# EAGLE board cortex-mpu - Copy (EAGLE 7.3.0)
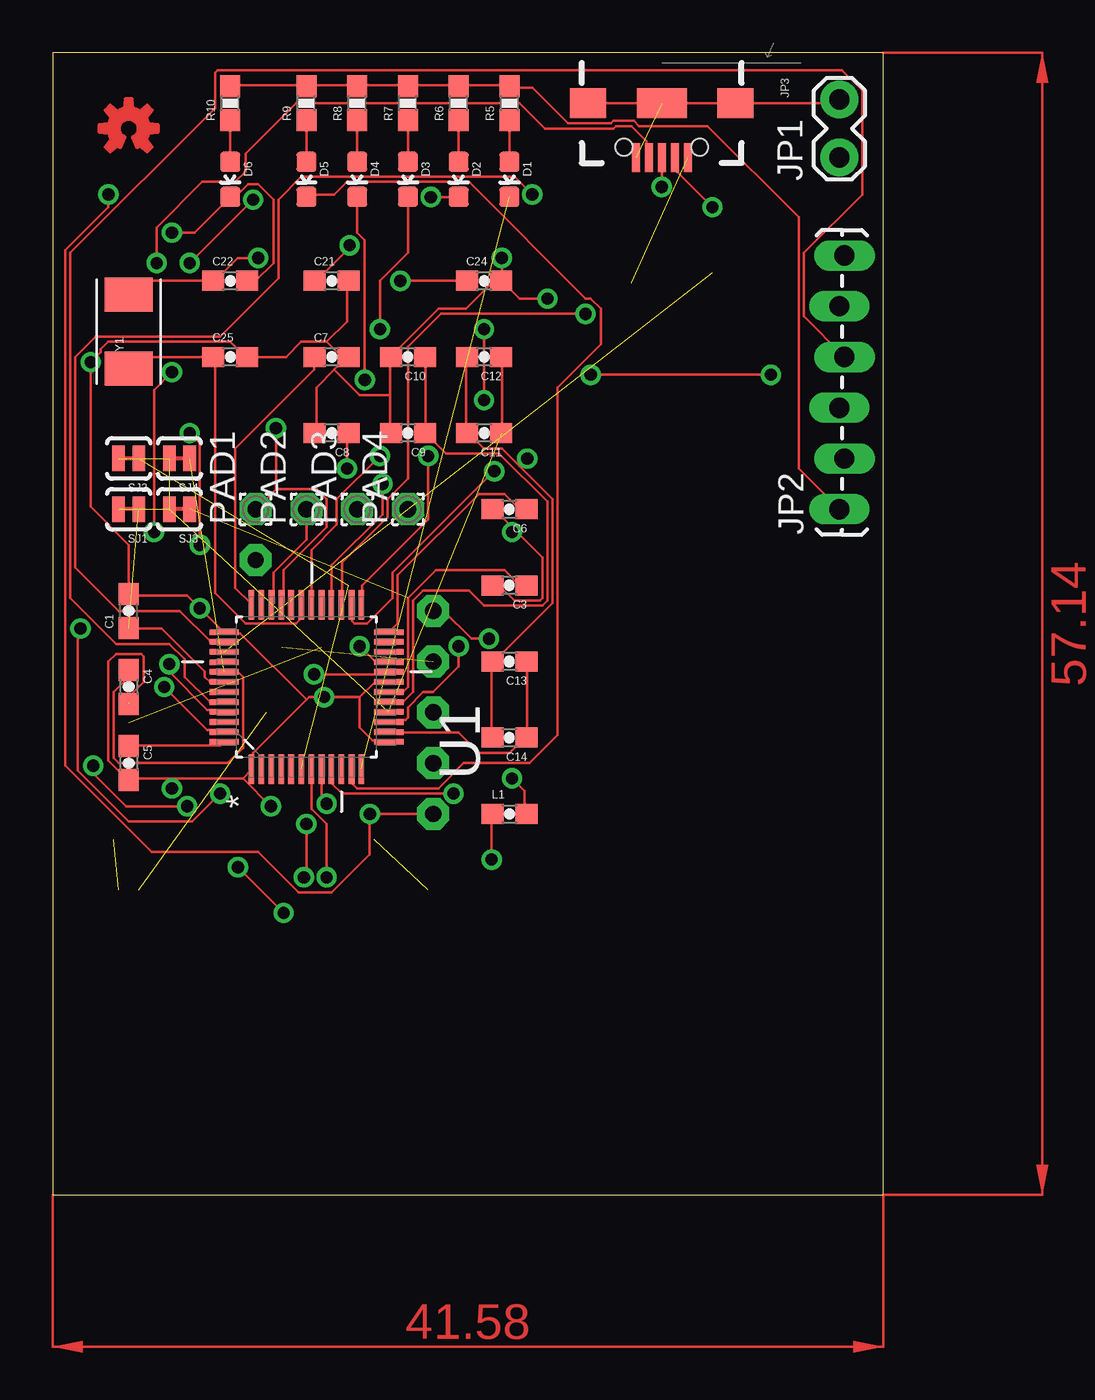
[diagram p0: board, top side]
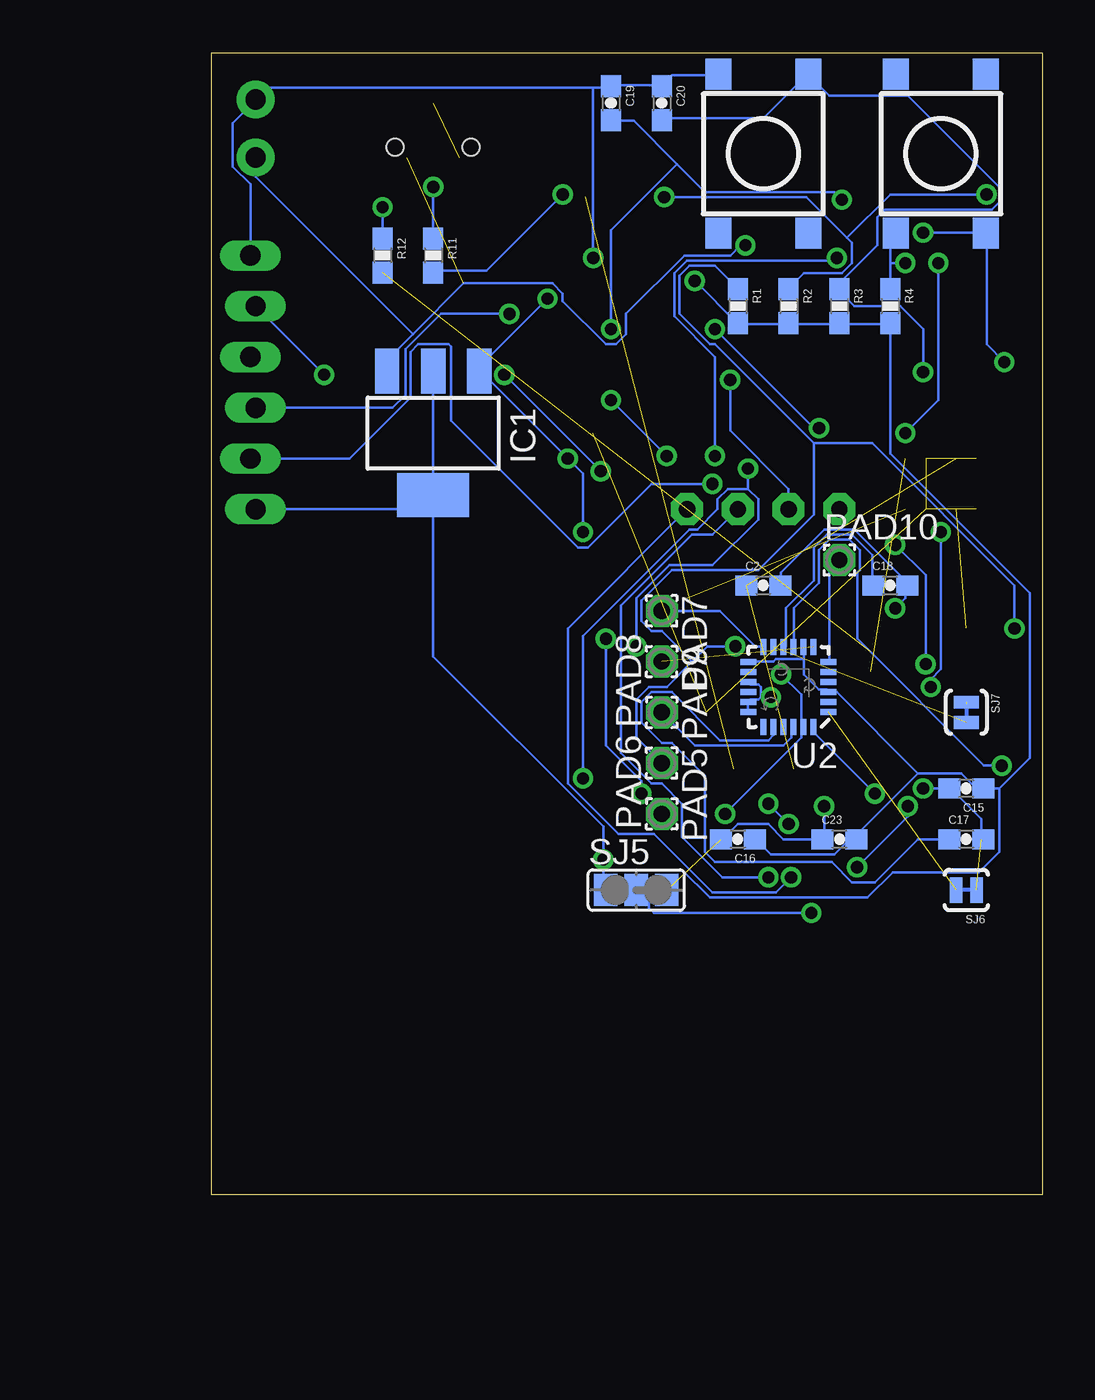
[diagram p1: board, bottom side, seen from below]

Size 41.58 x 57.14 mm. Coordinates in mm from the lower left corner, seen from the top.
Outline: 0,0 41.58,0 41.58,57.14 0,57.14 0,0
Copper layers (1*16): Top 0.035mm / dielectric 1.5mm / Bottom 0.035mm
Design rules "default *": minimum track width 5mil, minimum drill 24mil, track to track 5mil, track to pad 5mil, pad to pad 5mil, via to via 5mil, smd to smd 5mil, copper to edge 20mil, drill to drill 8mil, minimum pad ring 10mil, minimum via ring 8mil, stop-mask expansion 4mil, vias tented up to drill 0mil, thermal gap 10mil

## Footprints (pad centres in the part's own frame; a part is rotated, then mirrored left to right if it is on the bottom)
0603-CAP = smd 1.1 x 1: 1 -0.85,0; 2 0.85,0
LED-0603 = smd 1 x 1: A 0,-0.877; C 0,0.877
SOT223 = smd 1.219 x 2.235: 1 -2.311,-3.099; 2 0,-3.099; 3 2.311,-3.099 | smd 3.6 x 2.2: TAB 0,3.099
1X02_LOCK = drill 1.016 pad 1.88: 1 -0.178,0; 2 2.718,0
1X06_LOCK_LONGPADS = drill 1.016 long: 1 0,0; 2 2.54,-0.254; 3 5.08,0; 4 7.62,-0.254; 5 10.16,0; 6 12.7,-0.254
USB-B-MICRO-SMD_V03 = smd 1.45 x 0.4: D+1 2.725,0; D-1 2.725,0.65; GND1 2.725,-1.3; ID1 2.725,-0.65; VBUS1 2.725,1.3 | smd 1.5 x 1.8: SHIELD1 0,3.685; SHIELD2 0,-3.685 | smd 1.5 x 2.5: SHIELD3 0,0 | hole 0.85: 2.2,1.9; 2.2,-1.9
0603 = smd 1.1 x 1: 1 -0.85,0; 2 0.85,0
1,6/0,8 = drill 0.813 pad 1.6 octagon: 1 0,0
0603-RES = smd 1.1 x 1: 1 -0.85,0; 2 0.85,0
TACTILE_SWITCH_TALL = smd 1.55 x 1.3: A1 -3.975,-2.25; A2 3.975,-2.25; B1 -3.975,2.25; B2 3.975,2.25
PAD-JUMPER-2-NC_BY_TRACE_YES_SILK = smd 0.635 x 1.27: 1 -0.508,0; 2 0.508,0
PAD-JUMPER-3-2OF3_NC_BY_TRACE_YES_SILK_LARGE = smd 1.168 x 1.6: 1 -1.524,0; 2 0,0; 3 1.524,0
QFP50P900X900X120-48N = smd 1.473 x 0.279: 1 -4.115,2.743; 2 -4.115,2.261; 3 -4.115,1.753; 4 -4.115,1.245; 5 -4.115,0.762; 6 -4.115,0.254; 7 -4.115,-0.254; 8 -4.115,-0.762; 9 -4.115,-1.245; 10 -4.115,-1.753; 11 -4.115,-2.261; 12 -4.115,-2.743; 25 4.115,-2.743; 26 4.115,-2.261; 27 4.115,-1.753; 28 4.115,-1.245; 29 4.115,-0.762; 30 4.115,-0.254; 31 4.115,0.254; 32 4.115,0.762; 33 4.115,1.245; 34 4.115,1.753; 35 4.115,2.261; 36 4.115,2.743 | smd 0.279 x 1.473: 13 -2.743,-4.115; 14 -2.261,-4.115; 15 -1.753,-4.115; 16 -1.245,-4.115; 17 -0.762,-4.115; 18 -0.254,-4.115; 19 0.254,-4.115; 20 0.762,-4.115; 21 1.245,-4.115; 22 1.753,-4.115; 23 2.261,-4.115; 24 2.743,-4.115; 37 2.743,4.115; 38 2.261,4.115; 39 1.753,4.115; 40 1.245,4.115; 41 0.762,4.115; 42 0.254,4.115; 43 -0.254,4.115; 44 -0.762,4.115; 45 -1.245,4.115; 46 -1.753,4.115; 47 -2.261,4.115; 48 -2.743,4.115
QFN-24-NP = smd 0.8 x 0.3: 1 -2,1.25; 2 -2,0.75; 3 -2,0.25; 4 -2,-0.25; 5 -2,-0.75; 6 -2,-1.25; 13 2,-1.25; 14 2,-0.75; 15 2,-0.25; 16 2,0.25; 17 2,0.75; 18 2,1.25 | smd 0.3 x 0.8: 7 -1.25,-2; 8 -0.75,-2; 9 -0.25,-2; 10 0.25,-2; 11 0.75,-2; 12 1.25,-2; 19 1.25,2; 20 0.75,2; 21 0.25,2; 22 -0.25,2; 23 -0.75,2; 24 -1.25,2
CRYSTAL-TXC-7A = smd 1.7 x 2.4: P$1 1.85,0; P$2 -1.85,0

## Placement (x,y rotation side)
C1  100nF  [0603-CAP]  3.81,29.21 90 top
C2  100nF  [0603-CAP]  13.97,30.48 0 bottom
C3  100nF  [0603-CAP]  22.86,30.48 180 top
C4  100nF  [0603-CAP]  3.81,25.4 270 top
C5  100nF  [0603-CAP]  3.81,21.59 270 top
C6  100nF  [0603-CAP]  22.86,34.29 180 top
C7  100nF  [0603-CAP]  13.97,41.91 0 top
C8  100nF  [0603-CAP]  13.97,38.1 180 top
C9  1nF  [0603-CAP]  17.78,38.1 180 top
C10  4.7uF  [0603-CAP]  17.78,41.91 180 top
C11  470pF  [0603-CAP]  21.59,38.1 180 top
C12  2.2uF  [0603-CAP]  21.59,41.91 180 top
C13  1uF  [0603-CAP]  22.86,26.67 180 top
C14  10nF  [0603-CAP]  22.86,22.86 180 top
C15  10nF  [0603-CAP]  3.81,20.32 180 bottom
C16  0.1uF  [0603-CAP]  15.24,17.78 180 bottom
C17  2.2nF  [0603-CAP]  3.81,17.78 0 bottom
C18  0.1uF  [0603-CAP]  7.62,30.48 0 bottom
C19  100nF  [0603-CAP]  21.59,54.61 270 bottom
C20  100nF  [0603-CAP]  19.05,54.61 270 bottom
C21  10uF  [0603-CAP]  13.97,45.72 0 top
C22  22pF  [0603-CAP]  8.89,45.72 0 top
C23  100nF  [0603-CAP]  10.16,17.78 0 bottom
C24  10uF  [0603-CAP]  21.59,45.72 0 top
C25  22pF  [0603-CAP]  8.89,41.91 0 top
D1  GREEN  [LED-0603]  22.86,50.8 180 top
D2  GREEN  [LED-0603]  20.32,50.8 180 top
D3  GREEN  [LED-0603]  17.78,50.8 180 top
D4  GREEN  [LED-0603]  15.24,50.8 180 top
D5  GREEN  [LED-0603]  12.7,50.8 180 top
D6  BLUE  [LED-0603]  8.89,50.8 180 top
IC1  LM1117MPX-3.3  [SOT223]  30.48,38.1 180 bottom
JP1  [1X02_LOCK]  39.37,52.07 90 top
JP2  [1X06_LOCK_LONGPADS]  39.37,34.29 90 top
JP3  [USB-B-MICRO-SMD_V03]  30.48,54.61 270 top
L1  3.3uH  [0603]  22.86,19.05 0 top
LOGO1  OSHW-LOGOS-COPPER  [OSHW-LOGO-S_COPPER]  3.81,53.34 0 top
PAD1  [1,6/0,8]  10.16,34.29 90 top
PAD2  [1,6/0,8]  12.7,34.29 90 top
PAD3  [1,6/0,8]  15.24,34.29 90 top
PAD4  [1,6/0,8]  17.78,34.29 90 top
PAD5  [1,6/0,8]  19.05,21.59 270 bottom
PAD6  [1,6/0,8]  19.05,19.05 90 bottom
PAD7  [1,6/0,8]  19.05,29.21 270 bottom
PAD8  [1,6/0,8]  19.05,24.13 90 bottom
PAD9  [1,6/0,8]  19.05,26.67 270 bottom
PAD10  [1,6/0,8]  10.16,31.75 0 bottom
R1  10kR  [0603-RES]  15.24,44.45 270 bottom
R2  10kR  [0603-RES]  12.7,44.45 270 bottom
R3  10k  [0603-RES]  10.16,44.45 270 bottom
R4  10k  [0603-RES]  7.62,44.45 270 bottom
R5  150R  [0603-RES]  22.86,54.61 90 top
R6  150R  [0603-RES]  20.32,54.61 90 top
R7  150R  [0603-RES]  17.78,54.61 90 top
R8  150R  [0603-RES]  15.24,54.61 90 top
R9  150R  [0603-RES]  12.7,54.61 90 top
R10  1kR  [0603-RES]  8.89,54.61 90 top
R11  39R  [0603-RES]  30.48,46.99 270 bottom
R12  39R  [0603-RES]  33.02,46.99 270 bottom
S1  2SMD4  [TACTILE_SWITCH_TALL]  5.08,52.07 270 bottom
S2  2SMD-4  [TACTILE_SWITCH_TALL]  13.97,52.07 90 bottom
SJ1  [PAD-JUMPER-2-NC_BY_TRACE_YES_SILK]  3.81,34.29 180 top
SJ2  [PAD-JUMPER-2-NC_BY_TRACE_YES_SILK]  3.81,36.83 180 top
SJ3  [PAD-JUMPER-2-NC_BY_TRACE_YES_SILK]  6.35,34.29 180 top
SJ4  [PAD-JUMPER-2-NC_BY_TRACE_YES_SILK]  6.35,36.83 180 top
SJ5  SPK  [PAD-JUMPER-3-2OF3_NC_BY_TRACE_YES_SILK_LARGE]  20.32,15.24 0 bottom
SJ6  SPK  [PAD-JUMPER-2-NC_BY_TRACE_YES_SILK]  3.81,15.24 180 bottom
SJ7  SPK  [PAD-JUMPER-2-NC_BY_TRACE_YES_SILK]  3.81,24.13 270 bottom
U1  AT32UC3B164-AUT  [QFP50P900X900X120-48N]  12.7,25.4 90 top
U2  [QFN-24-NP]  12.7,25.4 180 bottom
Y1  7A-16  [CRYSTAL-TXC-7A]  3.81,43.18 90 top

## Library data of the parts
C1-C25 L1 R1-R12 SJ1-SJ7 = SparkFun-Passives
D1-D5 = SparkFun-LED; PROD_ID: DIO-00821
D6 = SparkFun-LED; PROD_ID: DIO-08575
IC1 = lm1117
JP1 JP2 = SparkFun-Connectors
JP3 = SparkFun-Connectors; PROD_ID: CONN-11752
LOGO1 = SparkFun-Aesthetics
PAD1-PAD10 = wirepad
S1 S2 = SparkFun-Electromechanical; PROD_ID: SWCH-11966
U1 = Atmel_By_element14_Batch_1-00; DESCRIPTION: MCU; MPN: AT32UC3B164-AUT; OC_FARNELL: 1841642; OC_NEWARK: 12T1375; PACKAGE: QFP-48; SUPPLIER: Atmel
U2 = SparkFun-Sensors
Y1 = SparkFun-FreqCtrl

## Nets
ADVREF: C13.1 C14.1 U1.14
DM: R12.2 U1.39
DP: R11.2 U1.38
E_SDA: PAD10.1 U2.6
GND: C1.2 C2.2 C3.2 C4.2 C5.2 C6.2 C7.2 C8.2 C9.2 C10.2 C11.2 C12.2 C13.2 C14.2 C15.2 C16.2 C17.2 C18.2 C19.1 C20.1 C21.2 C22.2 C23.1 C24.2 C25.2 D6.C IC1.1 JP1.2 JP2.6 JP3.GND1 JP3.SHIELD1 JP3.SHIELD2 JP3.SHIELD3 S1.B2 S2.B2 SJ5.3 SJ6.1 SJ7.1 U1.1 U1.13 U1.19 U1.37 U2.15 U2.17 U2.18
N$1: JP3.D-1 R12.1
N$2: JP3.D+1 R11.1
N$3: D1.A R5.1
N$4: D2.A R6.1
N$5: D6.A R10.1
N$6: D3.A R7.1
N$7: D4.A R8.1
N$8: D5.A R9.1
N$9: SJ6.2 U2.1
N$10: C18.1 U2.10
N$11: C17.1 U2.20
N$12: SJ5.2 U2.9
N$14: PAD9.1 U2.7
N$15: SJ7.2 U2.11
N$16: PAD8.1 U2.22
PA0: U1.3
PA1: U1.4
PA2: U1.5
PA3: PAD3.1 U1.7
PA4: PAD4.1 U1.8
PA5: PAD7.1 U1.9 U2.12
PA6: U1.10
PA7: D5.C U1.11
PA8: D1.C U1.12
PA9: D2.C PAD6.1 R2.1 U1.20 U2.23
PA10: PAD5.1 R1.1 U1.21 U2.24
PA11: U1.22
PA12: U1.23
PA13: C19.2 R4.1 S1.A2 U1.25
PA14: JP2.5 U1.26
PA15: JP2.3 U1.27
PA16: JP2.2 U1.28
PA17: U1.29
PA18: C22.1 U1.30 Y1.P$1
PA19: C25.1 U1.31 Y1.P$2
PA20: U1.32
PA21: D3.C PAD1.1 U1.33
PA22: D4.C PAD2.1 U1.34
PA23: U1.35
PA24: U1.43
PA25: JP2.4 U1.44
PA26: JP3.ID1 U1.45
PA27: U1.46
RESET_N: C20.2 R3.1 S2.A2 U1.47
VBUS: C21.1 IC1.3 JP1.1 JP3.VBUS1
VCC: C15.1 C16.1 C23.2 C24.1 IC1.2 IC1.TAB JP2.1 L1.1 R1.2 R2.2 R3.2 R4.2 R5.2 R6.2 R7.2 R8.2 R9.2 R10.2 SJ5.1 U2.3 U2.8 U2.13
VDDANA: C8.1 L1.2 U1.15
VDDCORE0: C1.1 SJ1.1 U1.42
VDDCORE1: C2.1 SJ2.1 U1.6
VDDCORE2: C3.1 SJ3.1 U1.18
VDDIN: C9.1 C10.1 U1.17
VDDIO0: C5.1 U1.48
VDDIO1: C6.1 U1.24
VDDIO2: C7.1 U1.36
VDDOUT: C11.1 C12.1 SJ1.2 SJ2.2 SJ3.2 SJ4.2 U1.16
VDDPLL: C4.1 SJ4.1 U1.41

## Tracks (layer width: path | path; a pad name or v marks a point on that pad's centre or on a via)
ADVREF
  Top 0.127: C13.1 23.75,26.67 23.75,22.86 C14.1 23.62,22.86 22.86,22.1 21.34,22.1 20.32,23.11 16.89,23.11 U1.14
DM  (1 unrouted)
DP  (via drill 0.61)
  Top 0.127: v24,50.04 23.11,50.93 12.45,50.93 11.3,49.78 11.3,45.85 8.38,42.93 2.16,42.93 1.14,41.91 1.14,31.37 3.3,29.21 6.35,29.21 7.87,27.69 8.51,27.69 U1.38
  Bottom 0.127: v24,50.04 27.81,46.23 30.48,46.23 R11.2
E_SDA
  Bottom 0.127: PAD10.1 10.67,31.24 10.67,26.67 U2.6
GND  (via drill 0.61)  (4 unrouted)
  Top 0.127: JP3.SHIELD2 JP3.SHIELD3 JP3.SHIELD1 39.24,54.61 39.37,54.74 JP1.2 | 15.37,24.89 v13.59,24.89 12.83,24.89 12.7,24.77 | 15.37,24.89 16.13,25.65 U1.19 | 15.37,24.89 15.37,23.37 16,22.73 16.76,22.73 U1.13 | 9.52,20.83 5.97,20.83 | 5.97,20.83 3.81,20.83 C5.2 3.81,20.7 2.79,21.72 2.79,26.67 3.17,27.05 4.45,27.05 4.57,26.92 4.57,25.65 3.81,24.89 C4.2 | 9.52,20.83 9.91,21.21 U1.1 10.03,21.34 10.03,22.1 12.7,24.77 | 5.97,20.83 v5.97,20.32 | 9.52,20.83 v10.92,19.43 | 12.7,24.77 9.4,28.07 8.64,28.07 U1.37 8.51,28.19 v7.37,29.34 6.73,29.97 3.81,29.97 C1.2 3.81,32.51 1.91,34.42 v1.91,41.66 2.41,42.16 2.41,42.29 2.79,42.67 8.89,42.67 9.65,41.91 C25.2 11.68,41.91 12.45,42.67 13.72,42.67 | C22.2 10.16,45.72 11.05,46.61 11.05,49.78 10.29,50.55 9.78,50.55 9.27,50.04 8.89,50.04 D6.C 7.11,48.13 v5.97,48.13 | 14.61,41.78 14.73,41.91 C7.2 14.61,41.78 | 14.61,41.78 14.1,41.28 | 14.1,41.28 13.21,40.39 13.21,38.1 C8.2 | 14.61,41.78 13.72,42.67 | 13.72,42.67 14.73,43.69 14.73,45.72 C21.2 | C14.2 21.97,22.86 21.97,26.67 C13.2 22.1,26.67 25.02,29.59 25.02,34.8 23.37,36.45 | C12.2 20.7,41.91 20.7,38.1 C11.2 20.83,38.1 21.59,37.34 22.48,37.34 23.37,36.45 | C3.2 22.35,30.48 23.11,29.72 24.38,29.72 24.51,29.84 24.51,31.88 23.11,33.27 | 23.11,33.27 22.1,34.29 C6.2 | 16.89,41.91 16.89,40.01 | 16.89,40.01 16.89,38.1 C9.2 | 16.89,41.91 19.3,44.32 20.7,44.32 22.1,45.72 C24.2 22.48,45.72 | 16.89,41.91 C10.2 | v24.77,44.83 23.37,44.83 22.48,45.72 | v22.99,33.15 23.11,33.27 | v23.75,36.83 23.37,36.45 | 14.1,41.28 15.37,40.01 16.89,40.01 | 22.48,45.72 v22.48,46.86
  Bottom 0.127: 19.05,55.5 21.59,55.5 C19.1 21.59,55.37 22.48,55.37 | 19.05,55.5 18.54,56.01 16.26,56.01 S2.B2 | 19.05,55.5 C20.1 | JP2.6 39.62,50.55 40.51,51.44 40.51,53.59 39.37,54.74 JP1.2 39.37,54.86 38.86,55.37 22.48,55.37 | 6.86,30.48 6.86,30.73 9.4,33.27 10.92,33.27 13.08,31.12 13.08,30.48 C2.2 | U2.18 14.73,24.26 14.73,24.64 U2.17 14.61,24.77 14.22,24.77 14.1,24.89 | 14.1,24.89 14.1,25.4 14.22,25.53 14.61,25.53 U2.15 | v13.59,24.89 14.1,24.89 | C16.2 16,17.78 15.24,18.54 13.72,18.54 12.95,17.78 C23.1 10.92,17.78 v10.92,19.43 | C17.2 3.05,17.78 3.05,18.8 4.57,20.32 C15.2 v5.97,20.32 | 6.86,30.48 6.86,29.84 v7.37,29.34 | 6.86,30.48 C18.2 | v5.97,48.13 2.92,48.13 S1.B2 2.79,48.01 2.79,42.55 v1.91,41.66 | v24.77,44.83 28.07,41.53 28.07,41.28 IC1.1 28.07,41.15 v23.75,36.83 22.99,36.07 v22.99,33.15 | v22.48,46.86 22.48,55.37
N$1  (via drill 0.61)
  Top 0.127: v33.02,49.4 31.24,51.18 31.24,51.82 JP3.D-1
  Bottom 0.127: v33.02,49.4 R12.1
N$2  (via drill 0.61)
  Top 0.127: JP3.D+1 v30.48,50.42
  Bottom 0.127: v30.48,50.42 R11.1
N$3
  Top 0.127: R5.1 D1.A
N$4
  Top 0.127: R6.1 D2.A
N$5
  Top 0.127: R10.1 D6.A
N$6
  Top 0.127: R7.1 D3.A
N$7
  Top 0.127: R8.1 D4.A
N$8
  Top 0.127: R9.1 D5.A
N$9  (1 unrouted)
N$10
  Bottom 0.127: U2.10 12.83,27.43 12.83,29.34 11.43,30.73 11.43,32.38 10.8,33.02 9.52,33.02 8.51,32 8.51,30.48 C18.1
N$11
  Bottom 0.127: C17.1 6.22,17.78 8.38,15.62 9.52,15.62 10.54,16.64 16.38,16.64 16.89,17.15 16.89,20.95 18.54,22.61 19.05,22.61 20.07,23.62 20.07,24.64 19.56,25.15 18.54,25.15 16.13,22.73 13.72,22.73 13.46,22.99 13.46,23.37 U2.20
N$12  (via drill 0.61)
  Top 0.127: v2.03,21.46 2.03,21.08 3.68,19.43 v6.73,19.43 | v11.56,14.1 v9.27,16.38
  Bottom 0.127: v2.03,21.46 2.92,21.46 9.27,27.81 9.27,31.12 9.14,31.24 9.14,32.26 9.65,32.77 10.67,32.77 11.18,32.26 11.18,30.61 12.45,29.34 12.45,27.43 U2.9 | v6.73,19.43 6.73,18.92 v9.27,16.38 | v11.56,14.1 19.43,14.1 19.69,14.35 19.69,15.11 19.05,15.24
N$14  (1 unrouted)
N$15  (1 unrouted)
N$16
  Bottom 0.127: PAD8.1 17.4,22.48 12.95,22.48 12.57,22.86 12.57,23.37 U2.22
PA3  (via drill 0.61)
  Top 0.127: U1.7 12.95,19.3 13.72,18.54 v13.72,15.88
  Bottom 0.127: v13.72,15.88 16,15.88 18.03,17.91 18.03,19.56 19.05,20.57 19.56,20.57 21.08,22.1 21.08,29.46 17.53,33.02 16.51,33.02 PAD3.1
PA4  (via drill 0.61)
  Top 0.127: U1.8 13.46,19.81 v13.72,19.56 | v12.7,18.54 12.7,16 v12.57,15.88
  Bottom 0.127: v12.7,18.54 v13.72,19.56 | v12.57,15.88 13.33,15.11 16.51,15.11 19.43,18.03 21.21,18.03 23.75,20.57 23.75,28.32 PAD4.1
PA5  (via drill 0.61)
  Top 0.127: v20.07,20.07 14.48,20.07 13.97,20.57 13.97,21.21 U1.9 | v21.84,27.81 20.95,27.81 19.56,29.21 PAD7.1
  Bottom 0.127: PAD7.1 16.13,29.21 14.35,27.43 13.97,27.43 U2.12 | v20.07,20.07 20.07,20.7 21.84,22.48 v21.84,27.81
PA7
  Top 0.127: D5.C 12.7,50.04 14.1,50.04 14.73,50.67 20.83,50.67 26.67,44.83 26.92,44.83 27.43,44.32 27.43,42.55 25.27,40.39 25.27,22.99 23.88,21.59 20.57,21.59 19.3,20.32 15.24,20.32 14.99,20.57 14.99,21.21 U1.11
PA8  (1 unrouted)
PA9  (via drill 0.61)
  Top 0.127: v18.92,49.91 D2.C | v13.08,26.04 16.64,26.04 16.76,26.16 U1.20 | PAD6.1 v15.88,19.05 15.88,17.02 13.97,15.11 12.32,15.11 10.29,17.15 4.95,17.15 0.63,21.46 0.63,47.24 2.79,49.4 v2.79,50.04
  Bottom 0.127: v18.92,49.91 11.81,49.91 9.78,47.88 | 9.78,47.88 9.52,47.62 9.52,46.61 10.03,46.1 11.94,46.1 12.7,45.34 R2.1 | v13.08,26.04 12.06,25.02 12.06,23.49 U2.23 12.06,23.37 12.06,22.86 v15.88,19.05 | 9.78,47.88 7.62,50.04 v2.79,50.04
PA10  (via drill 0.61)
  Top 0.127: v15.37,27.43 16.13,26.67 16.76,26.67 U1.21 | v8.38,20.07 6.98,18.67 3.81,18.67 1.27,21.21 1.27,28.19 v1.4,28.32
  Bottom 0.127: v15.37,27.43 16.76,27.43 17.53,26.67 | 17.53,26.67 18.8,25.4 19.69,25.4 20.32,24.77 20.32,22.86 PAD5.1 | v8.38,20.07 11.43,23.11 11.43,23.37 U2.24 | v1.4,28.32 1.4,30.48 8.51,37.59 11.43,37.59 | 11.43,37.59 16.38,42.55 16.64,42.55 18.16,44.07 18.16,45.97 17.65,46.48 16.38,46.48 15.24,45.34 R1.1 | 17.53,26.67 19.05,28.19 19.56,28.19 20.07,28.7 20.07,29.72 18.54,31.24 14.22,31.24 11.43,34.04 11.43,37.59
PA13  (via drill 0.61)
  Top 0.127: v6.86,46.61 v10.03,49.78 | v18.8,36.96 18.8,33.78 15.49,30.48 15.49,29.59 U1.25 | v21.59,43.31 v21.59,39.75
  Bottom 0.127: 7.62,46.61 7.62,47.75 7.37,48.01 S1.A2 | 7.62,46.61 R4.1 | 18.29,51.56 16.89,50.17 10.41,50.17 v10.03,49.78 | 18.29,51.56 20.45,53.72 21.59,53.72 C19.2 | 7.62,46.61 v6.86,46.61 | v21.59,39.75 v18.8,36.96 | v21.59,43.31 21.59,48.26 18.29,51.56
PA14  (via drill 0.61)
  Top 0.127: v22.1,36.2 17.02,31.12 17.02,29.84 15.75,28.58 15.11,28.58 14.99,28.7 14.99,29.46 U1.26 | v35.94,41.02 v26.92,41.02
  Bottom 0.127: v26.92,41.02 v22.1,36.2 | JP2.5 v35.94,41.02
PA15  (via drill 0.61)
  Top 0.127: v26.67,44.07 19.43,44.07 17.78,42.42 17.78,35.81 16.76,34.8 16.76,33.91 14.48,31.62 14.48,29.59 U1.27
  Bottom 0.127: v26.67,44.07 30.1,44.07 31.88,42.29 31.88,40.01 32.51,39.37 JP2.3
PA16  (via drill 0.61)
  Top 0.127: v16.51,35.56 16.51,34.04 13.97,31.5 13.97,29.59 U1.28
  Bottom 0.127: v16.51,35.56 19.56,35.56 22.73,32.38 23.24,32.38 29.59,38.73 29.59,42.42 29.72,42.55 31.24,42.55 31.62,42.16 31.62,39.88 34.67,36.83 JP2.2
PA18  (via drill 0.61)
  Top 0.127: Y1.P$1 3.81,45.08 4.45,45.72 C22.1 8.13,45.72 9.27,46.86 v10.29,46.86 | U1.30 12.95,32.26 14.22,33.53 14.22,34.8 v16.38,36.96
  Bottom 0.127: v16.38,36.96 16.38,41.91 18.41,43.94 18.41,46.1 17.78,46.74 10.41,46.74 v10.29,46.86
PA19
  Top 0.127: Y1.P$2 3.81,41.4 4.32,41.91 C25.1 8.13,41.91 8.13,30.1 9.65,28.58 12.19,28.58 12.45,28.83 U1.31
PA21  (via drill 0.61)
  Top 0.127: D3.C 17.78,47.12 16.38,45.72 v16.38,43.31 | 11.18,35.31 v11.18,38.35 | PAD1.1 11.18,35.31 | 11.18,35.31 13.21,35.31 13.72,34.8 13.72,33.4 11.56,31.24 11.56,29.59 U1.33
  Bottom 0.127: v16.38,43.31 11.43,38.35 v11.18,38.35
PA22  (via drill 0.61)
  Top 0.127: D4.C 15.24,48.13 15.62,47.75 v15.62,40.77 | PAD2.1 12.7,32.77 11.05,31.12 11.05,29.59 U1.34
  Bottom 0.127: v15.62,40.77 15.62,38.23 12.7,35.31 PAD2.1
PA25
  Top 0.127: U1.44 7.87,24.64 6.6,25.91 6.6,26.8 5.84,27.56 3.17,27.56 0.89,29.84 0.89,47.12 8.13,54.36 8.13,56.13 8.25,56.26 39.5,56.26 40.51,55.25 40.51,50.04 37.59,47.12 37.59,43.94 JP2.4
PA26  (via drill 0.61)
  Top 0.127: v5.21,46.61 5.21,48.39 7.49,50.67 9.14,50.67 9.65,51.18 9.65,52.07 12.19,54.61 23.37,54.61 24.64,53.34 28.07,53.34 28.19,53.47 28.96,53.47 29.72,52.7 29.72,51.94 JP3.ID1 | v6.86,38.1 7.37,37.59 v7.37,32.51 | v5.84,26.54 5.84,26.16 7.75,24.26 8.51,24.26 U1.45
  Bottom 0.127: v5.21,46.61 5.21,39.75 v6.86,38.1 | v7.37,32.51 5.84,30.99 v5.84,26.54
RESET_N  (via drill 0.61)
  Top 0.127: v5.59,25.4 7.75,23.24 8.51,23.24 U1.47 | v5.08,33.15 5.08,40.26 v5.97,41.15
  Bottom 0.127: C20.2 19.05,53.85 13.97,53.85 11.81,56.01 S2.A2 11.68,56.01 10.67,54.99 6.73,54.99 2.03,50.29 2.03,49.78 2.54,49.28 7.87,49.28 8.25,48.89 8.25,47.5 10.16,45.59 R3.1 10.16,45.21 9.4,44.45 7.11,44.45 5.97,43.31 v5.97,41.15 | v5.59,25.4 5.59,25.78 5.08,26.29 v5.08,33.15
VBUS  (via drill 0.61)  (1 unrouted)
  Top 0.127: v14.86,47.5 14.86,47.37 13.21,45.72 C21.1
  Bottom 0.127: v14.86,47.5 15.11,47.5 15.62,46.99 17.91,46.99 20.83,44.07 20.83,43.05 21.34,42.55 21.84,42.55 24,44.7 24,45.08 24.51,45.59 28.96,45.59 31.5,43.05 | 31.5,43.05 32.77,41.78 32.77,41.28 IC1.3 | JP1.1 39.37,50.93 31.5,43.05
VCC  (via drill 0.61)
  Top 0.127: v17.4,45.72 C24.1 | 12.7,55.5 8.89,55.5 R10.2 | 12.7,55.5 15.24,55.5 | 12.7,55.5 R9.2 | 15.24,55.5 17.78,55.5 | 15.24,55.5 R8.2 | 17.78,55.5 20.32,55.5 | 17.78,55.5 R7.2 | 20.32,55.5 22.86,55.5 R5.2 22.86,55.37 24,55.37 25.78,53.59 27.94,53.59 28.07,53.72 29.08,53.72 29.34,53.47 32.77,53.47 37.34,48.89 37.34,36.32 JP2.1 | 20.32,55.5 R6.2 | v21.97,16.76 21.97,19.05 L1.1
  Bottom 0.127: 10.16,43.56 7.62,43.56 | 10.16,43.56 12.7,43.56 | 10.16,43.56 R3.2 | 12.7,43.56 15.24,43.56 | 12.7,43.56 R2.2 | 15.24,43.56 v17.4,45.72 | 15.24,43.56 R1.2 | 11.94,26.8 11.94,27.3 U2.8 | 11.94,26.8 11.94,26.04 11.18,25.27 10.8,25.27 U2.3 10.67,25.15 10.29,25.15 6.22,21.08 | 11.94,26.8 13.33,26.8 13.46,26.67 14.61,26.67 U2.13 | 9.52,17.78 9.65,17.78 10.41,17.02 13.59,17.02 14.35,17.78 C16.1 | 9.52,17.78 C23.2 9.4,17.78 | 6.22,21.08 4.06,21.08 3.3,20.32 C15.1 2.16,20.32 | 9.52,17.78 6.22,21.08 | 7.62,43.56 7.62,37.08 0.63,30.1 0.63,21.84 2.16,20.32 | 7.62,43.56 R4.2 | 21.97,16.26 21.97,15.37 SJ5.1 | 21.97,16.26 v21.97,16.76 21.97,18.41 30.48,26.92 30.48,34.29 | IC1.TAB IC1.2 | IC1.TAB 30.48,34.29 | 30.48,34.29 JP2.1 | 30.48,34.92 IC1.TAB | 2.16,20.32 2.16,17.15 3.17,16.13 7.49,16.13 8.76,14.86 16.64,14.86 18.03,16.26 21.97,16.26
VDDANA  (via drill 0.61)
  Top 0.127: v14.73,36.32 14.73,38.1 C8.1 | v20.32,27.43 20.32,26.42 19.05,25.15 18.54,25.15 17.78,24.38 17.78,23.88 17.65,23.75 16.89,23.75 U1.15 | v22.99,20.83 23.62,20.19 23.62,19.05 L1.2
  Bottom 0.127: 14.73,35.31 v14.73,36.32 | 14.73,35.31 14.22,34.8 14.22,33.78 16.51,31.5 18.67,31.5 20.32,29.84 v20.32,27.43 | v22.99,20.83 22.99,27.94 17.65,33.27 17.27,33.27 16.26,34.29 16.26,34.8 15.75,35.31 14.73,35.31
VDDCORE0  (1 unrouted)
  Top 0.127: U1.42 7.87,25.65 7.62,25.91 7.62,26.16 5.46,28.32 3.81,28.32 C1.1
VDDCORE1  (2 unrouted)
VDDCORE2  (1 unrouted)
  Top 0.127: C3.1 23.37,30.48 22.61,31.24 19.18,31.24 17.78,29.84 17.78,25.4 17.53,25.15 U1.18
VDDIN
  Top 0.127: 18.67,38.1 18.67,41.91 C10.1 | U1.17 17.53,24.64 18.03,25.15 18.03,29.72 18.54,30.23 20.83,30.23 21.59,29.46 24.51,29.46 24.77,29.72 24.77,34.67 22.35,37.08 19.69,37.08 18.67,38.1 | 18.67,38.1 C9.1
VDDIO0
  Top 0.127: C5.1 3.81,22.48 8.38,22.48 8.51,22.61 U1.48
VDDIO1
  Top 0.127: C6.1 23.37,34.29 22.61,35.05 21.34,35.05 17.27,30.99 17.27,28.58 16.89,28.19 U1.24
VDDIO2
  Top 0.127: C7.1 13.08,41.91 13.08,41.28 9.14,37.34 9.14,30.35 9.91,29.59 U1.36
VDDOUT  (5 unrouted)
  Top 0.127: C11.1 22.48,38.1 22.48,41.91 C12.1
VDDPLL  (1 unrouted)
  Top 0.127: C4.1 3.81,25.91 3.05,25.15 3.05,21.84 3.3,21.59 8.76,21.59 9.52,22.35 9.52,25.91 9.27,26.16 U1.41
(copper drawn outside any net)
  shapes: Top area x2